# Altium PCB Controller.PcbDoc
Units mm, origin at the board's own origin, x right, y up, seen from the top; angles counter-clockwise.
Board outline 154.94 x 111.76 mm, 2 copper layers (Top Layer, Bottom Layer); 185 components, 89 nets, 468 pads, 0 vias.
Unrouted connection lines stored in the file: 6.
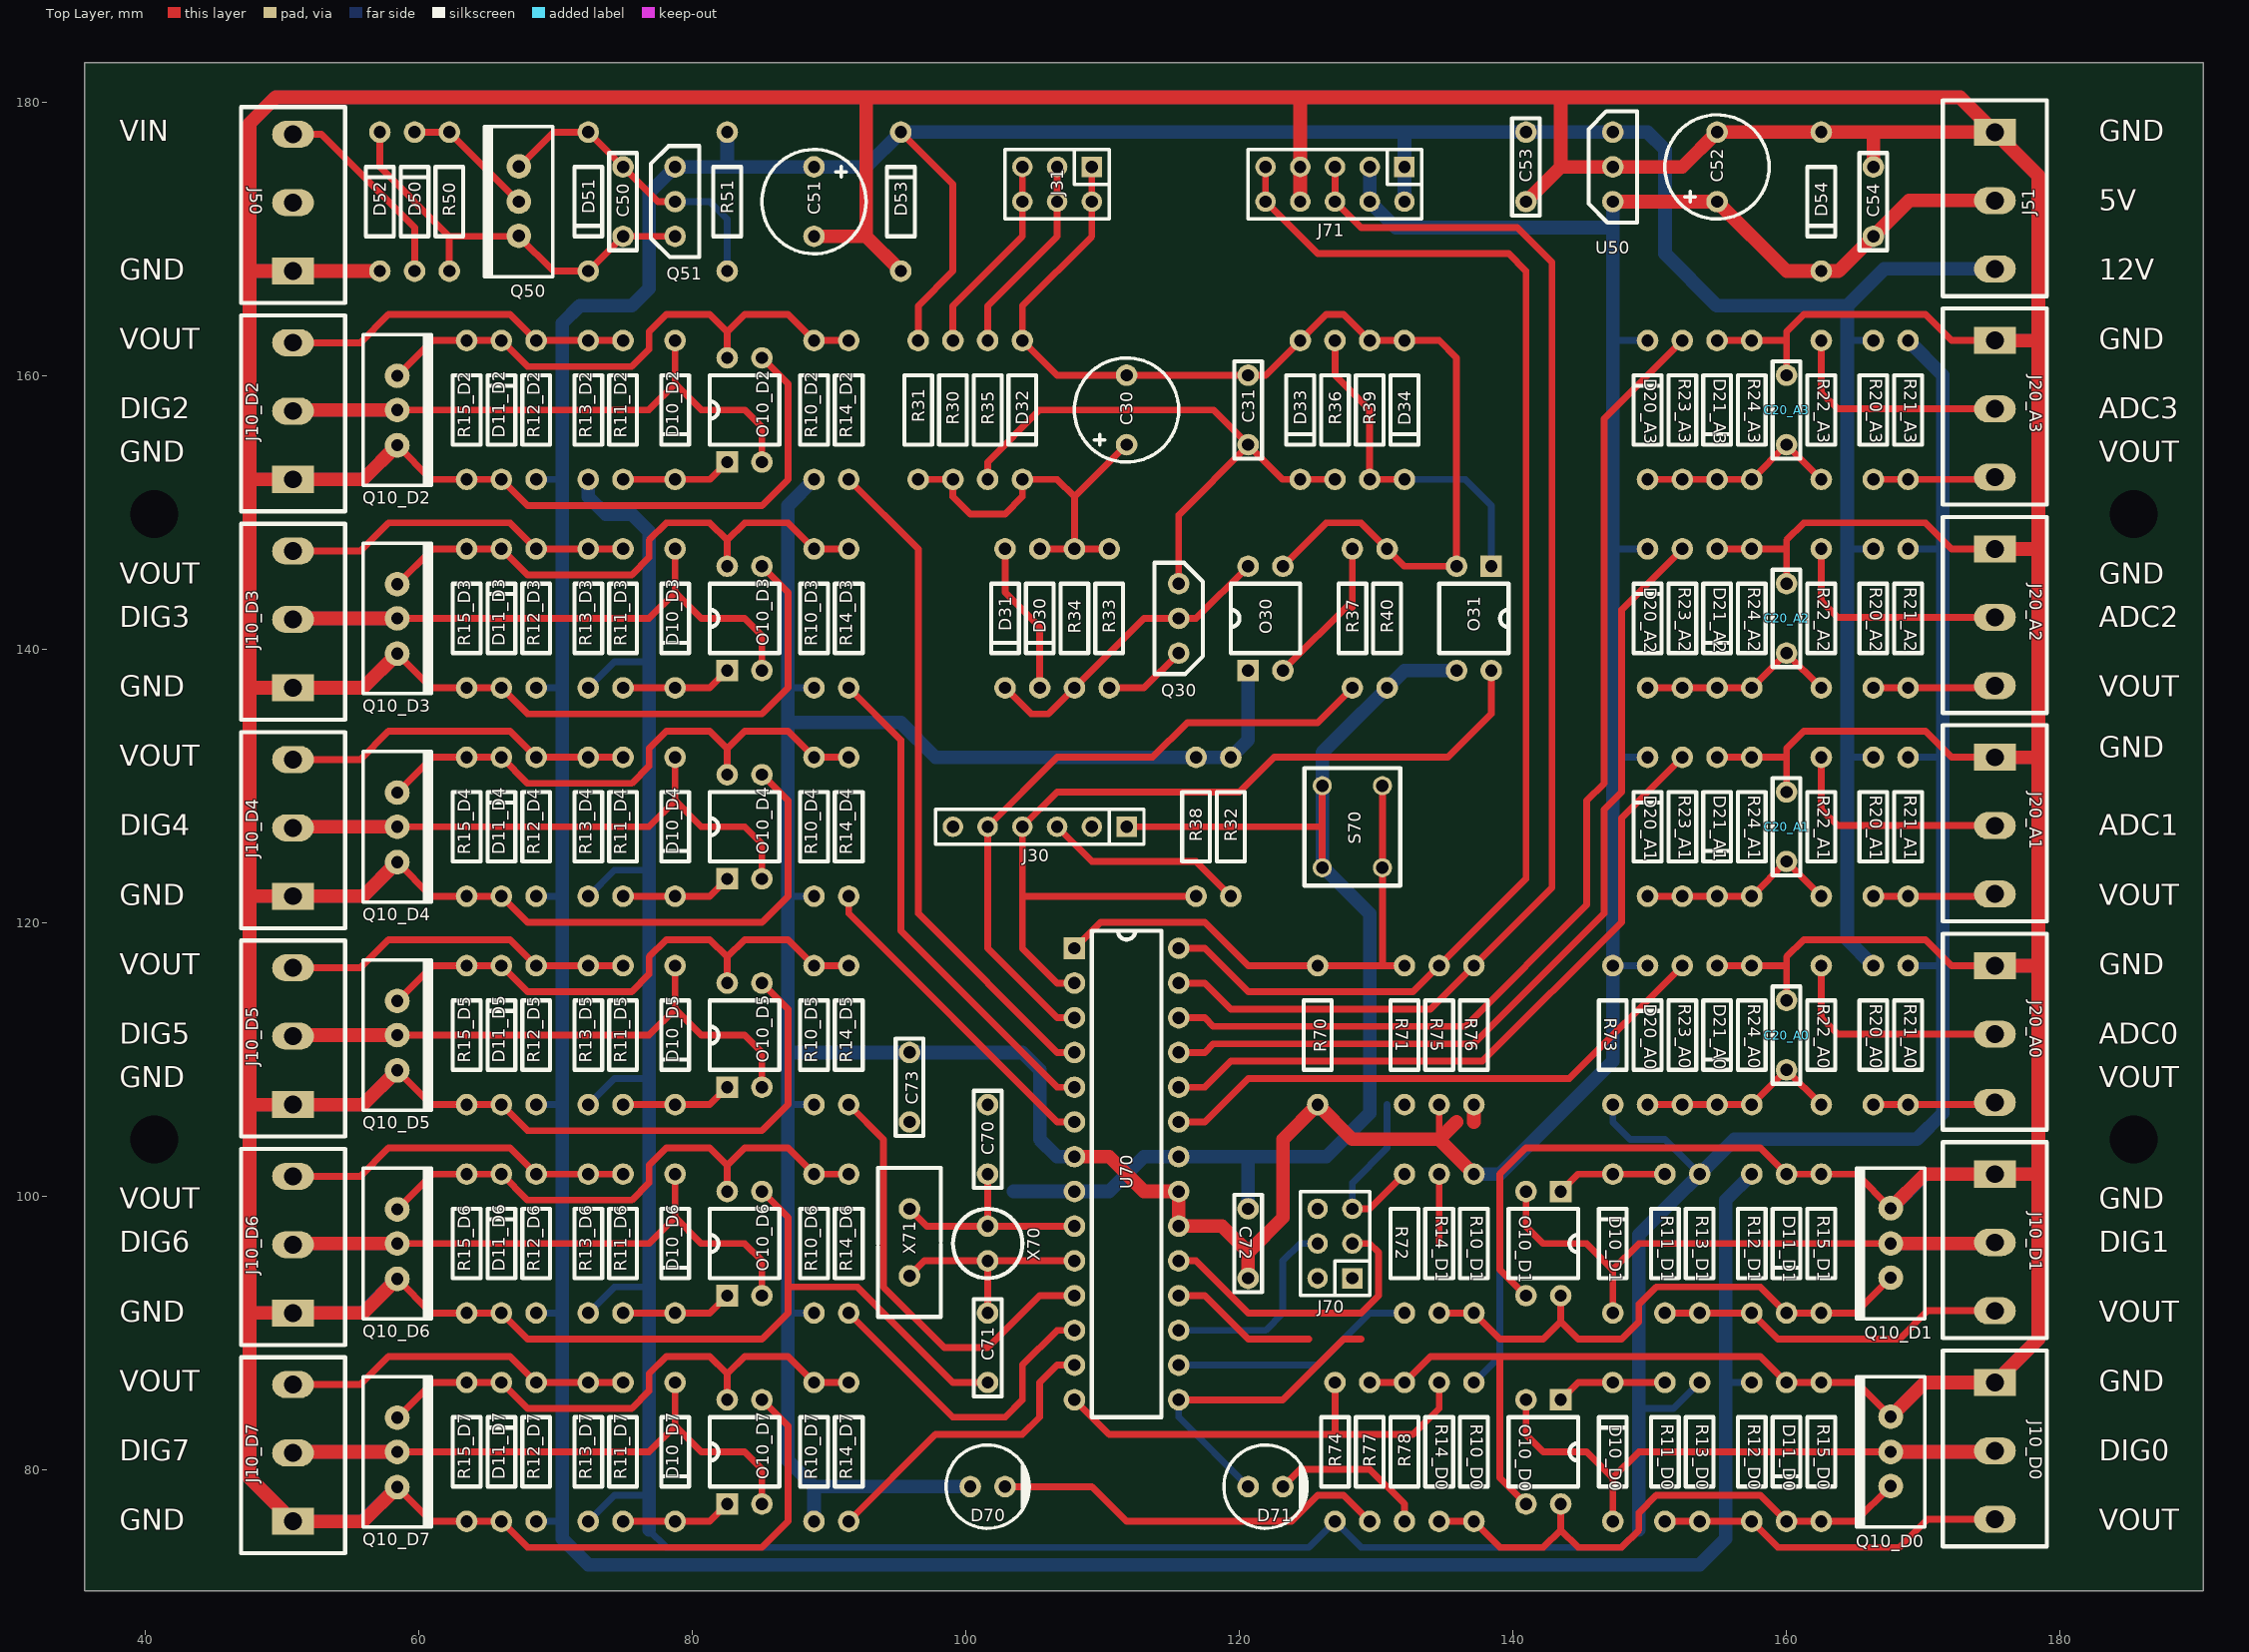
[diagram p0: Top Layer view]
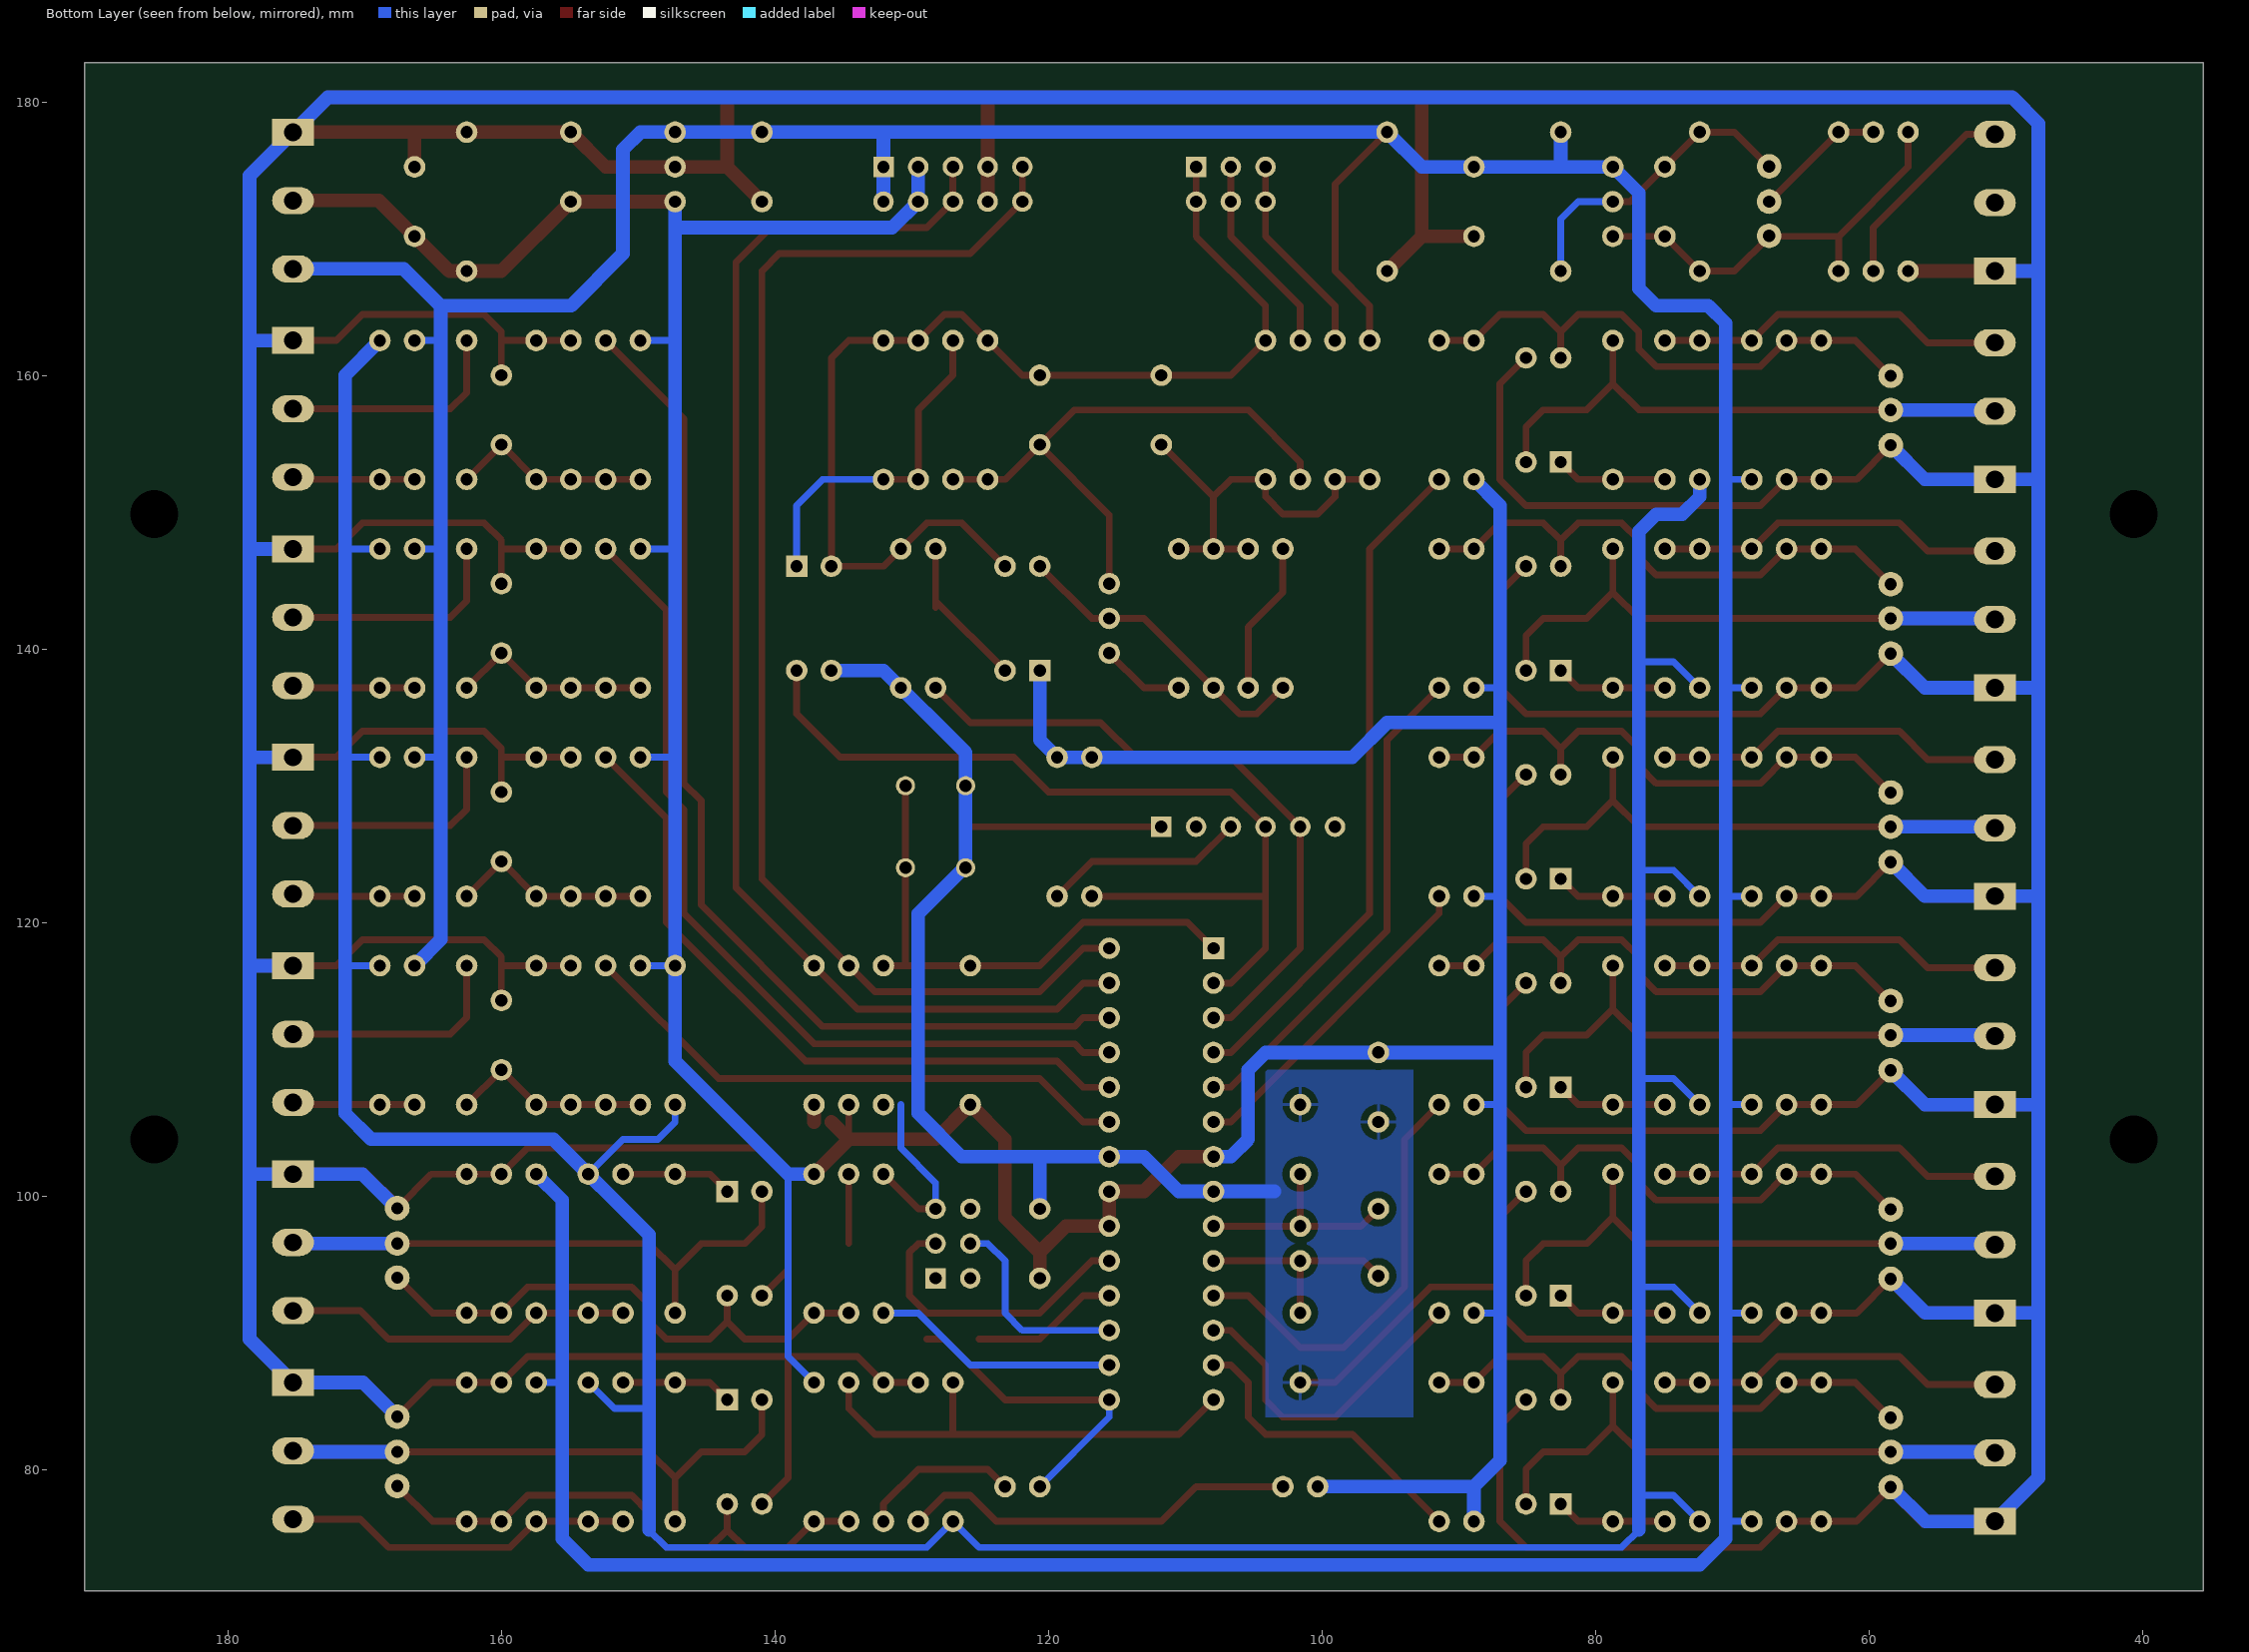
[diagram p1: Bottom Layer view, seen from below]

## Layer stack, top to bottom
Top Layer: signal copper 0.0356
Dielectric: dielectric 0.32, FR-4, Dk 4.8
Bottom Layer: signal copper 0.0356

## Board outline
35.56,71.12 190.5,71.12 190.5,182.88 35.56,182.88

## Design rules (kind name [scope] priority, off if disabled: settings)
Clearance [All] p1: gap=0.5
ComponentClearance [All] p1: gap=0.127 collisioncheckmode=3 verticalgap=0.254
HoleSize [All] p1: absolutevalues=TRUE maxlimit=5 minlimit=0.025 maxpercent=80.000 minpercent=20.000
PolygonConnect [All] p1: connectstyle=Relief reliefconductorwidth=0.254 reliefentries=4 polygonreliefangle="90 Angle"
RoomDefinition M0 [InComponentClass('M0')] p1: confinementstyle=ConfineIn formatcopy=TRUE lockcomponents=FALSE outline 92.71,73.66 149.86,73.66 149.86,182.88 92.71,182.88
RoomDefinition P0 [InComponentClass('P0')] p2: confinementstyle=ConfineIn formatcopy=TRUE lockcomponents=FALSE outline 45.72,165.1 180.34,165.1 180.34,180.34 45.72,180.34
RoomDefinition A0 [InComponentClass('A0')] p3: confinementstyle=ConfineIn formatcopy=TRUE lockcomponents=FALSE outline 180.34,119.38 147.32,119.38 147.32,104.14 180.34,104.14
RoomDefinition A1 [InComponentClass('A1')] p4: confinementstyle=ConfineIn formatcopy=TRUE lockcomponents=FALSE outline 180.34,134.62 147.32,134.62 147.32,119.38 180.34,119.38
RoomDefinition A2 [InComponentClass('A2')] p5: confinementstyle=ConfineIn formatcopy=TRUE lockcomponents=FALSE outline 180.34,149.86 147.32,149.86 147.32,134.62 180.34,134.62
RoomDefinition A3 [InComponentClass('A3')] p6: confinementstyle=ConfineIn formatcopy=TRUE lockcomponents=FALSE outline 180.34,165.1 147.32,165.1 147.32,149.86 180.34,149.86
RoomDefinition D0 [InComponentClass('D0')] p7: confinementstyle=ConfineIn formatcopy=TRUE lockcomponents=FALSE outline 180.34,88.9 132.08,88.9 132.08,73.66 180.34,73.66
RoomDefinition D1 [InComponentClass('D1')] p8: confinementstyle=ConfineIn formatcopy=TRUE lockcomponents=FALSE outline 180.34,104.14 132.08,104.14 132.08,88.9 180.34,88.9
RoomDefinition D2 [InComponentClass('D2')] p9: confinementstyle=ConfineIn formatcopy=TRUE lockcomponents=FALSE outline 45.72,149.86 93.98,149.86 93.98,165.1 45.72,165.1
RoomDefinition D3 [InComponentClass('D3')] p10: confinementstyle=ConfineIn formatcopy=TRUE lockcomponents=FALSE outline 45.72,134.62 93.98,134.62 93.98,149.86 45.72,149.86
RoomDefinition D4 [InComponentClass('D4')] p11: confinementstyle=ConfineIn formatcopy=TRUE lockcomponents=FALSE outline 45.72,119.38 93.98,119.38 93.98,134.62 45.72,134.62
RoomDefinition D5 [InComponentClass('D5')] p12: confinementstyle=ConfineIn formatcopy=TRUE lockcomponents=FALSE outline 45.72,104.14 92.71,104.14 92.71,119.38 45.72,119.38
RoomDefinition D6 [InComponentClass('D6')] p13: confinementstyle=ConfineIn formatcopy=TRUE lockcomponents=FALSE outline 45.72,88.9 92.71,88.9 92.71,104.14 45.72,104.14
RoomDefinition D7 [InComponentClass('D7')] p14: confinementstyle=ConfineIn formatcopy=TRUE lockcomponents=FALSE outline 45.72,73.66 92.71,73.66 92.71,88.9 45.72,88.9
RoomDefinition C0 [InComponentClass('C0')] p15: confinementstyle=ConfineIn formatcopy=TRUE lockcomponents=FALSE outline 146.05,114.3 146.05,177.8 82.55,177.8 82.55,114.3
RoutingVias [All] p1: holewidth=0.711 width=1.27 viastyle="Through Hole" minholewidth=0.711 minwidth=1.27 maxholewidth=0.711 maxwidth=1.27
SolderMaskExpansion [All] p1: expansion=0.102
TestPointUsage [All] p1: valid=0 allowmultiple=FALSE
Testpoint [All] p1: side=15 testpointundercomponent=TRUE minsize=1.016 maxsize=2.54 preferedsize=1.524 minholesize=0 maxholesize=1.016 preferedholesize=0.813 testpointgrid=0.025 style=1023 order=0-112345678
Width [All] p1: maxlimit=5 minlimit=0.5 preferedwidth=0.5
17 further rules are at their usual default settings.

## Classes and differential pairs
component class P0: C50 C51 C52 C53 C54 D50 D51 D52 D53 D54 J50 J51 Q50 Q51 R50 R51 U50
component class M0: C70 C71 C72 C73 D70 D71 J70 J71 R70 R71 R72 R73 R74 R75 R76 R77 R78 S70 U70 X70 X71
component class D7: D10_D7 D11_D7 J10_D7 O10_D7 Q10_D7 R10_D7 R11_D7 R12_D7 R13_D7 R14_D7 R15_D7
component class D6: D10_D6 D11_D6 J10_D6 O10_D6 Q10_D6 R10_D6 R11_D6 R12_D6 R13_D6 R14_D6 R15_D6
component class D5: D10_D5 D11_D5 J10_D5 O10_D5 Q10_D5 R10_D5 R11_D5 R12_D5 R13_D5 R14_D5 R15_D5
component class D4: D10_D4 D11_D4 J10_D4 O10_D4 Q10_D4 R10_D4 R11_D4 R12_D4 R13_D4 R14_D4 R15_D4
component class D3: D10_D3 D11_D3 J10_D3 O10_D3 Q10_D3 R10_D3 R11_D3 R12_D3 R13_D3 R14_D3 R15_D3
component class D2: D10_D2 D11_D2 J10_D2 O10_D2 Q10_D2 R10_D2 R11_D2 R12_D2 R13_D2 R14_D2 R15_D2
component class D1: D10_D1 D11_D1 J10_D1 O10_D1 Q10_D1 R10_D1 R11_D1 R12_D1 R13_D1 R14_D1 R15_D1
component class D0: D10_D0 D11_D0 J10_D0 O10_D0 Q10_D0 R10_D0 R11_D0 R12_D0 R13_D0 R14_D0 R15_D0
component class C0: C30 C31 D30 D31 D32 D33 D34 J30 J31 O30 O31 Q30 R30 R31 R32 R33 R34 R35 R36 R37 R38 R39 R40
component class A3: C20_A3 D20_A3 D21_A3 J20_A3 R20_A3 R21_A3 R22_A3 R23_A3 R24_A3
component class A2: C20_A2 D20_A2 D21_A2 J20_A2 R20_A2 R21_A2 R22_A2 R23_A2 R24_A2
component class A1: C20_A1 D20_A1 D21_A1 J20_A1 R20_A1 R21_A1 R22_A1 R23_A1 R24_A1
component class A0: C20_A0 D20_A0 D21_A0 J20_A0 R20_A0 R21_A0 R22_A0 R23_A0 R24_A0
channel class Analog: A0 A1 A2 A3
channel class Digital: D0 D1 D2 D3 D4 D5 D6 D7

## Components (designator, comment, footprint, x,y, rotation, side; value= is the part's Value field where it differs from the comment)
C20_A0 "100N" AXIAL02 160.02,109.22 r90 top (schematic designator C20)
C20_A1 "100N" AXIAL02 160.02,124.46 r90 top (schematic designator C20)
C20_A2 "100N" AXIAL02 160.02,139.7 r90 top (schematic designator C20)
C20_A3 "100N" AXIAL02 160.02,154.94 r90 top (schematic designator C20)
C30 "10U" RADIAL02P 111.76,154.94 r90 top
C31 "100P" AXIAL02 120.65,154.94 r90 top
C50 "100N" AXIAL02 74.93,170.18 r90 top
C51 "10U" RADIAL02P 88.9,175.26 r270 top
C52 "10U" RADIAL02P 154.94,172.72 r90 top
C53 "100N" AXIAL02 140.97,177.8 r270 top
C54 "100N" AXIAL02 166.37,170.18 r90 top
C70 "18P" AXIAL02 101.6,101.6 r90 top
C71 "18P" AXIAL02 101.6,91.44 r270 top
C72 "100N" AXIAL02 120.65,93.98 r90 top
C73 "100N" AXIAL02 95.885,110.49 r270 top
D10_D0 "D-1N4148" DO35S 147.32,76.2 r90 top (schematic designator D10)
D10_D1 "D-1N4148" DO35S 147.32,91.44 r90 top (schematic designator D10)
D10_D2 "D-1N4148" DO35S 78.74,162.56 r270 top (schematic designator D10)
D10_D3 "D-1N4148" DO35S 78.74,147.32 r270 top (schematic designator D10)
D10_D4 "D-1N4148" DO35S 78.74,132.08 r270 top (schematic designator D10)
D10_D5 "D-1N4148" DO35S 78.74,116.84 r270 top (schematic designator D10)
D10_D6 "D-1N4148" DO35S 78.74,101.6 r270 top (schematic designator D10)
D10_D7 "D-1N4148" DO35S 78.74,86.36 r270 top (schematic designator D10)
D11_D0 "5V6" DO35S 160.02,86.36 r270 top (schematic designator D11)
D11_D1 "5V6" DO35S 160.02,101.6 r270 top (schematic designator D11)
D11_D2 "5V6" DO35S 66.04,152.4 r90 top (schematic designator D11)
D11_D3 "5V6" DO35S 66.04,137.16 r90 top (schematic designator D11)
D11_D4 "5V6" DO35S 66.04,121.92 r90 top (schematic designator D11)
D11_D5 "5V6" DO35S 66.04,106.68 r90 top (schematic designator D11)
D11_D6 "5V6" DO35S 66.04,91.44 r90 top (schematic designator D11)
D11_D7 "5V6" DO35S 66.04,76.2 r90 top (schematic designator D11)
D20_A0 "D-1N4148" DO35S 149.86,106.68 r90 top (schematic designator D20)
D20_A1 "D-1N4148" DO35S 149.86,121.92 r90 top (schematic designator D20)
D20_A2 "D-1N4148" DO35S 149.86,137.16 r90 top (schematic designator D20)
D20_A3 "D-1N4148" DO35S 149.86,152.4 r90 top (schematic designator D20)
D21_A0 "D-1N4148" DO35S 154.94,116.84 r270 top (schematic designator D21)
D21_A1 "D-1N4148" DO35S 154.94,132.08 r270 top (schematic designator D21)
D21_A2 "D-1N4148" DO35S 154.94,147.32 r270 top (schematic designator D21)
D21_A3 "D-1N4148" DO35S 154.94,162.56 r270 top (schematic designator D21)
D30 "D-1N4148" DO35S 105.41,147.32 r270 top
D31 "D-1N4148" DO35S 102.87,147.32 r270 top
D32 "15V" DO35S 104.14,162.56 r270 top
D33 "5V6" DO35S 124.46,162.56 r270 top
D34 "D-1N4148" DO35S 132.08,162.56 r270 top
D50 "D-1N4001" DO35S 59.69,167.64 r90 top
D51 "12V" DO35S 72.39,177.8 r270 top
D52 "15V" DO35S 57.15,167.64 r90 top
D53 "15V" DO35S 95.25,167.64 r90 top
D54 "5V6" DO35S 162.56,177.8 r270 top
D70 "RED" LED5MM 101.6,78.74 r0 top
D71 "AMBER" LED5MM 121.92,78.74 r0 top
J10_D0 "TERM" MKD500S3 175.26,86.36 r270 top (schematic designator J10)
J10_D1 "TERM" MKD500S3 175.26,101.6 r270 top (schematic designator J10)
J10_D2 "TERM" MKD500S3 50.8,152.4 r90 top (schematic designator J10)
J10_D3 "TERM" MKD500S3 50.8,137.16 r90 top (schematic designator J10)
J10_D4 "TERM" MKD500S3 50.8,121.92 r90 top (schematic designator J10)
J10_D5 "TERM" MKD500S3 50.8,106.68 r90 top (schematic designator J10)
J10_D6 "TERM" MKD500S3 50.8,91.44 r90 top (schematic designator J10)
J10_D7 "TERM" MKD500S3 50.8,76.2 r90 top (schematic designator J10)
J20_A0 "TERM" MKD500S3 175.26,116.84 r270 top (schematic designator J20)
J20_A1 "TERM" MKD500S3 175.26,132.08 r270 top (schematic designator J20)
J20_A2 "TERM" MKD500S3 175.26,147.32 r270 top (schematic designator J20)
J20_A3 "TERM" MKD500S3 175.26,162.56 r270 top (schematic designator J20)
J30 "HDR1X6" HDR6X1 111.76,127 r180 top
J31 "HDR3X2" HDR3X2 109.22,175.26 r180 top
J50 "TERM" MKD500S3 50.8,167.64 r90 top
J51 "TERM" MKD500S3 175.26,177.8 r270 top
J70 "HDR3X2" HDR3X2 128.27,93.98 r90 top
J71 "HDR5X2" HDR5X2 132.08,175.26 r180 top
O10_D0 "FOD817B" DIP4 143.51,85.09 r270 top (schematic designator O10)
O10_D1 "FOD817B" DIP4 143.51,100.33 r270 top (schematic designator O10)
O10_D2 "FOD817B" DIP4 82.55,153.67 r90 top (schematic designator O10)
O10_D3 "FOD817B" DIP4 82.55,138.43 r90 top (schematic designator O10)
O10_D4 "FOD817B" DIP4 82.55,123.19 r90 top (schematic designator O10)
O10_D5 "FOD817B" DIP4 82.55,107.95 r90 top (schematic designator O10)
O10_D6 "FOD817B" DIP4 82.55,92.71 r90 top (schematic designator O10)
O10_D7 "FOD817B" DIP4 82.55,77.47 r90 top (schematic designator O10)
O30 "FOD817B" DIP4 120.65,138.43 r90 top
O31 "FOD817B" DIP4 138.43,146.05 r270 top
Q10_D0 "FQPF10N20C" TO220V 167.64,81.28 r90 top (schematic designator Q10)
Q10_D1 "FQPF10N20C" TO220V 167.64,96.52 r90 top (schematic designator Q10)
Q10_D2 "FQPF10N20C" TO220V 58.42,157.48 r270 top (schematic designator Q10)
Q10_D3 "FQPF10N20C" TO220V 58.42,142.24 r270 top (schematic designator Q10)
Q10_D4 "FQPF10N20C" TO220V 58.42,127 r270 top (schematic designator Q10)
Q10_D5 "FQPF10N20C" TO220V 58.42,111.76 r270 top (schematic designator Q10)
Q10_D6 "FQPF10N20C" TO220V 58.42,96.52 r270 top (schematic designator Q10)
Q10_D7 "FQPF10N20C" TO220V 58.42,81.28 r270 top (schematic designator Q10)
Q30 "Q-BC558" TO92 115.57,139.7 r90 top
Q50 "FQPF10N20C" TO220V 67.31,172.72 r90 top
Q51 "BC548" TO92 78.74,175.26 r270 top
R10_D0 "4K7" AXIAL04 137.16,76.2 r90 top (schematic designator R10)
R10_D1 "4K7" AXIAL04 137.16,91.44 r90 top (schematic designator R10)
R10_D2 "4K7" AXIAL04 88.9,162.56 r270 top (schematic designator R10)
R10_D3 "4K7" AXIAL04 88.9,147.32 r270 top (schematic designator R10)
R10_D4 "4K7" AXIAL04 88.9,132.08 r270 top (schematic designator R10)
R10_D5 "4K7" AXIAL04 88.9,116.84 r270 top (schematic designator R10)
R10_D6 "4K7" AXIAL04 88.9,101.6 r270 top (schematic designator R10)
R10_D7 "4K7" AXIAL04 88.9,86.36 r270 top (schematic designator R10)
R11_D0 "33R" AXIAL04 151.13,86.36 r270 top (schematic designator R11)
R11_D1 "33R" AXIAL04 151.13,101.6 r270 top (schematic designator R11)
R11_D2 "33R" AXIAL04 74.93,152.4 r90 top (schematic designator R11)
R11_D3 "33R" AXIAL04 74.93,137.16 r90 top (schematic designator R11)
R11_D4 "33R" AXIAL04 74.93,121.92 r90 top (schematic designator R11)
R11_D5 "33R" AXIAL04 74.93,106.68 r90 top (schematic designator R11)
R11_D6 "33R" AXIAL04 74.93,91.44 r90 top (schematic designator R11)
R11_D7 "33R" AXIAL04 74.93,76.2 r90 top (schematic designator R11)
R12_D0 "33R" AXIAL04 157.48,76.2 r90 top (schematic designator R12)
R12_D1 "33R" AXIAL04 157.48,91.44 r90 top (schematic designator R12)
R12_D2 "33R" AXIAL04 68.58,162.56 r270 top (schematic designator R12)
R12_D3 "33R" AXIAL04 68.58,147.32 r270 top (schematic designator R12)
R12_D4 "33R" AXIAL04 68.58,132.08 r270 top (schematic designator R12)
R12_D5 "33R" AXIAL04 68.58,116.84 r270 top (schematic designator R12)
R12_D6 "33R" AXIAL04 68.58,101.6 r270 top (schematic designator R12)
R12_D7 "33R" AXIAL04 68.58,86.36 r270 top (schematic designator R12)
R13_D0 "33R" AXIAL04 153.67,76.2 r90 top (schematic designator R13)
R13_D1 "33R" AXIAL04 153.67,91.44 r90 top (schematic designator R13)
R13_D2 "33R" AXIAL04 72.39,162.56 r270 top (schematic designator R13)
R13_D3 "33R" AXIAL04 72.39,147.32 r270 top (schematic designator R13)
R13_D4 "33R" AXIAL04 72.39,132.08 r270 top (schematic designator R13)
R13_D5 "33R" AXIAL04 72.39,116.84 r270 top (schematic designator R13)
R13_D6 "33R" AXIAL04 72.39,101.6 r270 top (schematic designator R13)
R13_D7 "33R" AXIAL04 72.39,86.36 r270 top (schematic designator R13)
R14_D0 "3K3" AXIAL04 134.62,76.2 r90 top (schematic designator R14)
R14_D1 "3K3" AXIAL04 134.62,91.44 r90 top (schematic designator R14)
R14_D2 "3K3" AXIAL04 91.44,162.56 r270 top (schematic designator R14)
R14_D3 "3K3" AXIAL04 91.44,147.32 r270 top (schematic designator R14)
R14_D4 "3K3" AXIAL04 91.44,132.08 r270 top (schematic designator R14)
R14_D5 "3K3" AXIAL04 91.44,116.84 r270 top (schematic designator R14)
R14_D6 "3K3" AXIAL04 91.44,101.6 r270 top (schematic designator R14)
R14_D7 "3K3" AXIAL04 91.44,86.36 r270 top (schematic designator R14)
R15_D0 "100K" AXIAL04 162.56,86.36 r270 top (schematic designator R15)
R15_D1 "100K" AXIAL04 162.56,101.6 r270 top (schematic designator R15)
R15_D2 "100K" AXIAL04 63.5,152.4 r90 top (schematic designator R15)
R15_D3 "100K" AXIAL04 63.5,137.16 r90 top (schematic designator R15)
R15_D4 "100K" AXIAL04 63.5,121.92 r90 top (schematic designator R15)
R15_D5 "100K" AXIAL04 63.5,106.68 r90 top (schematic designator R15)
R15_D6 "100K" AXIAL04 63.5,91.44 r90 top (schematic designator R15)
R15_D7 "100K" AXIAL04 63.5,76.2 r90 top (schematic designator R15)
R20_A0 "33R" AXIAL04 166.37,106.68 r90 top (schematic designator R20)
R20_A1 "33R" AXIAL04 166.37,121.92 r90 top (schematic designator R20)
R20_A2 "33R" AXIAL04 166.37,137.16 r90 top (schematic designator R20)
R20_A3 "33R" AXIAL04 166.37,152.4 r90 top (schematic designator R20)
R21_A0 "33R" AXIAL04 168.91,106.68 r90 top (schematic designator R21)
R21_A1 "33R" AXIAL04 168.91,121.92 r90 top (schematic designator R21)
R21_A2 "33R" AXIAL04 168.91,137.16 r90 top (schematic designator R21)
R21_A3 "33R" AXIAL04 168.91,152.4 r90 top (schematic designator R21)
R22_A0 "33R" AXIAL04 162.56,106.68 r90 top (schematic designator R22)
R22_A1 "33R" AXIAL04 162.56,121.92 r90 top (schematic designator R22)
R22_A2 "33R" AXIAL04 162.56,137.16 r90 top (schematic designator R22)
R22_A3 "33R" AXIAL04 162.56,152.4 r90 top (schematic designator R22)
R23_A0 "1K" AXIAL04 152.4,106.68 r90 top (schematic designator R23)
R23_A1 "1K" AXIAL04 152.4,121.92 r90 top (schematic designator R23)
R23_A2 "1K" AXIAL04 152.4,137.16 r90 top (schematic designator R23)
R23_A3 "1K" AXIAL04 152.4,152.4 r90 top (schematic designator R23)
R24_A0 "33R" AXIAL04 157.48,116.84 r270 top (schematic designator R24)
R24_A1 "33R" AXIAL04 157.48,132.08 r270 top (schematic designator R24)
R24_A2 "33R" AXIAL04 157.48,147.32 r270 top (schematic designator R24)
R24_A3 "33R" AXIAL04 157.48,162.56 r270 top (schematic designator R24)
R30 "33R" AXIAL04 99.06,162.56 r270 top
R31 "33R" AXIAL04 96.52,152.4 r90 top
R32 "33R" AXIAL04 119.38,121.92 r90 top
R33 "33R" AXIAL04 110.49,137.16 r90 top
R34 "1K5" AXIAL04 107.95,137.16 r90 top
R35 "33R" AXIAL04 101.6,162.56 r270 top
R36 "3K3" AXIAL04 127,162.56 r270 top
R37 "3K3" AXIAL04 128.27,137.16 r90 top
R38 "4K7" AXIAL04 116.84,121.92 r90 top
R39 "1K5" AXIAL04 129.54,162.56 r270 top
R40 "33R" AXIAL04 130.81,147.32 r270 top
R50 "100K" AXIAL04 62.23,167.64 r90 top
R51 "10R" AXIAL04 82.55,177.8 r270 top
R70 "10K" AXIAL04 125.73,116.84 r270 top
R71 "33R" AXIAL04 132.08,116.84 r270 top
R72 "33R" AXIAL04 132.08,91.44 r90 top
R73 "33R" AXIAL04 147.32,106.68 r90 top
R74 "33R" AXIAL04 127,76.2 r90 top
R75 "1K" AXIAL04 134.62,116.84 r270 top
R76 "1K" AXIAL04 137.16,116.84 r270 top
R77 "1K" AXIAL04 129.54,86.36 r270 top
R78 "1K" AXIAL04 132.08,86.36 r270 top
S70 "S-BUTTON" SWPB 128.27,127 r0 top
U50 "LP2950-5V" TO92 147.32,177.8 r270 top
U70 "ATMEGA8" DIP28N 107.95,118.11 r0 top
X70 "32.768K" RADIAL01 101.6,97.79 r270 top
X71 "4M" HC49 95.885,99.06 r270 top

## Footprints (in the part's own frame and the unit in brackets; to place one, negate y for a bottom-side part, rotate by r counter-clockwise, add the part's x,y. Pads: shape width x height; smd on the part's side, far side on the other; paste and mask are expansions set on the pad)
AXIAL02 [mil]
  round 62 hole 35.43: 1(0,0) 2(200,0)
  silkscreen extent -40,-40 240,40
AXIAL04 [mil]
  round 62 hole 35.43: 1(0,0) 2(400,0)
  silkscreen extent 100,-40 300,40
DIP4 [mil]
  rect 62x62 hole 35.43: 1(0,0)
  round 62 hole 35.43: 2(0,-100) 3(300,-100) 4(300,0)
  silkscreen extent 50,-150 250,50
DIP28N [mil]
  rect 62x62 hole 35.43: 1(0,0)
  round 62 hole 35.43: 2(0,-100) 3(0,-200) 4(0,-300) 5(0,-400) 6(0,-500) 7(0,-600) 8(0,-700) 9(0,-800) 10(0,-900) 11(0,-1000) 12(0,-1100) 13(0,-1200) 14(0,-1300) 15(300,-1300) 16(300,-1200) 17(300,-1100) 18(300,-1000) 19(300,-900) 20(300,-800) 21(300,-700) 22(300,-600) 23(300,-500) 24(300,-400) 25(300,-300) 26(300,-200) 27(300,-100) 28(300,0)
  silkscreen extent 50,-1350 250,50
DO35S [mil]
  round 62 hole 35.43: 1(0,0) 2(400,0)
  silkscreen extent 100,-40 300,40
HC49 [mil]
  round 62 hole 35.43: 1(0,0) 2(192.91,0)
  silkscreen extent -118,-91 311,91
HDR3X2 [mm] "Header 3 x 2"
  rect 1.5x1.5 hole 0.9: 1(0,0)
  round 1.5 hole 0.9: 2(0,2.54) 3(2.54,0) 4(2.54,2.54) 5(5.08,0) 6(5.08,2.54)
  silkscreen extent -1.27,-1.27 6.35,3.81
HDR5X2 [mm] "Header 5 x 2"
  rect 1.5x1.5 hole 0.9: 1(0,0)
  round 1.5 hole 0.9: 2(0,2.54) 3(2.54,0) 4(2.54,2.54) 5(5.08,0) 6(5.08,2.54) 7(7.62,0) 8(7.62,2.54) 9(10.16,0) 10(10.16,2.54)
  silkscreen extent -1.27,-1.27 11.43,3.81
HDR6X1 [mm] "Header 6 x 1"
  rect 1.5x1.5 hole 0.9: 1(0,0)
  round 1.5 hole 0.9: 2(2.54,0) 3(5.08,0) 4(7.62,0) 5(10.16,0) 6(12.7,0)
  silkscreen extent -1.27,-1.27 13.97,1.27
LED5MM [mil]
  round 62 hole 35.43: 1(-50,0) 2(50,0)
  silkscreen extent -120,-120 120,120
MKD500S3 [mil]
  rect 78x120 hole 51.18: 1(0,0)
  oval 78x120 hole 51.18: 2(196.85,0) 3(393.7,0)
  silkscreen extent -92,-150 472,150
RADIAL01 [mil]
  round 62 hole 35.43: 1(0,0) 2(100,0)
  silkscreen extent -50,-100 150,100
RADIAL02P [mil]
  round 62 hole 35.43: 1(0,0) 2(200,0)
  silkscreen extent -50,-150 250,150
SWPB [mm]
  round 1.4 hole 0.9: 1(-2.2,3) 2(2.2,3) 3(-2.2,-3) 4(2.2,-3)
  silkscreen extent -3.5,-4.3 3.5,4.3
TO92 [mil]
  round 62 hole 35.43: 1(0,0) 2(100,0) 3(200,0)
  silkscreen extent -60,-70 260,70
TO220V [mm] "TO220"
  round 1.8 hole 0.9: 1(-2.5,0) 2(0,0) 3(2.58,0)
  silkscreen extent -5.5,-2.5 5.5,2.5

## Part data
C20_A0 C20_A1 C20_A2 C20_A3 C50 C53 C54 C72 C73: library part C-B100N, "CAPACITOR"
C30 C51 C52: library part C-A10U, "CAP"
C31: library part C-B100P, "CAPACITOR"
C70 C71: library part C-B18P, "CAPACITOR"
D10_D0 D10_D1 D10_D2 D10_D3 D10_D4 D10_D5 D10_D6 D10_D7 D20_A0 D20_A1 D20_A2 D20_A3 D21_A0 D21_A1 D21_A2 D21_A3 D30 D31 D34: "1N4148"
D11_D0 D11_D1 D11_D2 D11_D3 D11_D4 D11_D5 D11_D6 D11_D7 D51: library part D-BZX79-12, "ZENER DIODE"
D32 D52 D53: library part D-BZX79-15, "ZENER DIODE"
D33 D54: library part D-BZX79-5V6, "ZENER DIODE"
D50: "1N4001"
D70: library part O-RED, "LED"
D71: library part O-AMBER, "LED"
J10_D0 J10_D1 J10_D2 J10_D3 J10_D4 J10_D5 J10_D6 J10_D7 J20_A0 J20_A1 J20_A2 J20_A3 J50 J51: library part J-SCR-3, "CONNECTOR"
J30: library part J-HDR1X6, "CONNECTOR"
J31: library part J-HDR3X2A, "CONNECTOR"
J70: library part J-HDR3X2, "CONNECTOR"
J71: library part J-HDR5X2A, "CONNECTOR"
O10_D0 O10_D1 O10_D2 O10_D3 O10_D4 O10_D5 O10_D6 O10_D7 O30 O31: library part O-FOD817B, "OPTO ISOLATOR"
Q10_D0 Q10_D1 Q10_D2 Q10_D3 Q10_D4 Q10_D5 Q10_D6 Q10_D7 Q50: library part Q-FQPF10N20C, "MOSFET"
Q30: "BC558"
Q51: library part Q-BC548
R10_D0 R10_D1 R10_D2 R10_D3 R10_D4 R10_D5 R10_D6 R10_D7 R38: library part R-A4K7, "RESISTOR"
R11_D0 R11_D1 R11_D2 R11_D3 R11_D4 R11_D5 R11_D6 R11_D7 R12_D0 R12_D1 R12_D2 R12_D3 R12_D4 R12_D5 R12_D6 R12_D7 R13_D0 R13_D1 R13_D2 R13_D3 R13_D4 R13_D5 R13_D6 R13_D7 R20_A0 R20_A1 R20_A2 R20_A3 R21_A0 R21_A1 R21_A2 R21_A3 R22_A0 R22_A1 R22_A2 R22_A3 R24_A0 R24_A1 R24_A2 R24_A3 R30 R31 R32 R33 R35 R40 R71 R72 R73 R74: library part R-A33R, "RESISTOR"
R14_D0 R14_D1 R14_D2 R14_D3 R14_D4 R14_D5 R14_D6 R14_D7 R36 R37: library part R-A3K3, "RESISTOR"
R15_D0 R15_D1 R15_D2 R15_D3 R15_D4 R15_D5 R15_D6 R15_D7 R50: library part R-A100K, "RESISTOR"
R23_A0 R23_A1 R23_A2 R23_A3 R75 R76 R77 R78: library part R-A1K, "RESISTOR"
R34 R39: library part R-A1K5, "RESISTOR"
R51: library part R-A10R, "RESISTOR"
R70: library part R-A10K, "RESISTOR"
S70: "PUSH BUTTON SWITCH"
U50: library part U-LP2950, "LP2950"
U70: library part U-ATMEGA8, "MICROCONTROLLER"
X70: library part X-32K768, "CRYSTAL"
X71: library part X-4M, "CRYSTAL"

## Free pads (board coordinates)
  round 0 hole 3.5 unplated: 0(40.64,104.14) 0(40.64,149.86) 0(185.42,104.14) 0(185.42,149.86)

## Nets (pads, with @x,y where several pads share a name; then routed paths per layer and width w, separated by ;. In a path a pad name is that pad's centre, name@x,y a point inside that pad or via, vN(x,y) a via of type N, cw(c..) or ccw(c..) an arc to the next point about the centre after c; other vN are vias at no path point)
0V: C20_A0.2 C20_A1.2 C20_A2.2 C20_A3.2 C51.2 C52.2 C53.2 C54.2 C70.2 C71.2 C72.2 C73.2 D11_D0.1 D11_D1.1 D11_D2.1 D11_D3.1 D11_D4.1 D11_D5.1 D11_D6.1 D11_D7.1 D21_A0.1 D21_A1.1 D21_A2.1 D21_A3.1 D52.1 D53.1 D54.1 J10_D0.1 J10_D1.1 J10_D2.1 J10_D3.1 J10_D4.1 J10_D5.1 J10_D6.1 J10_D7.1 J20_A0.1 J20_A1.1 J20_A2.1 J20_A3.1 J30.1 J50.1 J51.1 J70.6 J71.7 J71.8 O10_D0.3 O10_D1.3 O10_D2.3 O10_D3.3 O10_D4.3 O10_D5.3 O10_D6.3 O10_D7.3 O31.3 Q10_D0.3 Q10_D1.3 Q10_D2.3 Q10_D3.3 Q10_D4.3 Q10_D5.3 Q10_D6.3 Q10_D7.3 R15_D0.1 R15_D1.1 R15_D2.1 R15_D3.1 R15_D4.1 R15_D5.1 R15_D6.1 R15_D7.1 R24_A0.1 R24_A1.1 R24_A2.1 R24_A3.1 R40.2 R77.1 R78.1 S70.1 S70.3 U50.2 U70.8 U70.22 | length 1485.9
  Top Layer w0.5: Q10_D7.3 60.92,76.2 D11_D7.1 67.945,74.295 85.09,74.295 86.995,76.2 86.995,83.185 O10_D7.3 ; Q10_D6.3 60.92,91.44 D11_D6.1 67.945,89.535 85.09,89.535 86.995,91.44 86.995,98.425 O10_D6.3 ; Q10_D5.3 60.92,106.68 D11_D5.1 67.945,104.775 85.09,104.775 86.995,106.68 86.995,113.665 O10_D5.3 ; Q10_D4.3 60.92,121.92 D11_D4.1 67.945,120.015 85.09,120.015 86.995,121.92 86.995,128.905 O10_D4.3 ; Q10_D3.3 60.92,137.16 D11_D3.1 67.945,135.255 85.09,135.255 86.995,137.16 86.995,144.145 O10_D3.3 ; Q10_D2.3 60.92,152.4 D11_D2.1 67.945,150.495 85.09,150.495 86.995,152.4 86.995,159.385 O10_D2.3 ; 86.995,93.345 92.075,93.345 99.06,86.36 C71.2 ; J30.1 126.07,127 ; S70.3 S70.1 ; R77.1 R78.1 133.985,88.265 158.115,88.265 D11_D0.1 165.14,86.36 Q10_D0.3 ; 139.065,88.265 139.065,79.375 O10_D0.3 ; O10_D1.3 139.065,94.615 139.065,101.6 140.97,103.505 158.115,103.505 D11_D1.1 165.14,101.6 Q10_D1.3 ; D21_A0.1 160.02,116.84 ; D21_A1.1 160.02,132.08 ; D21_A2.1 160.02,147.32 ; D21_A3.1 160.02,162.56 ; C20_A0.2 160.02,117.475 161.29,118.745 170.18,118.745 172.085,116.84 J20_A0.1 ; C20_A1.2 160.02,132.715 161.29,133.985 170.18,133.985 172.085,132.08 J20_A1.1 ; C20_A2.2 160.02,147.955 161.29,149.225 170.18,149.225 172.085,147.32 J20_A2.1 ; C20_A3.2 160.02,163.195 161.29,164.465 170.18,164.465 172.085,162.56 J20_A3.1
  Top Layer w1: 47.625,91.44 55.92,91.44 Q10_D6.3 ; 47.625,106.68 55.92,106.68 Q10_D5.3 ; 47.625,121.92 55.92,121.92 Q10_D4.3 ; 47.625,137.16 55.92,137.16 Q10_D3.3 ; 47.625,152.4 55.92,152.4 Q10_D2.3 ; 47.625,167.64 D52.1 ; Q10_D7.3 55.92,76.2 J10_D7.1 47.625,79.375 47.625,178.435 49.53,180.34 172.72,180.34 178.435,174.625 178.435,89.535 J10_D0.1 170.14,86.36 Q10_D0.3 ; C51.2 92.71,170.18 ; 92.71,180.34 92.71,170.18 ; D53.1 92.71,170.18 ; J71.8 124.46,180.34 ; C53.2 143.51,175.26 ; 143.51,180.34 143.51,175.26 ; C54.2 166.37,177.8 ; Q10_D1.3 170.14,101.6 178.435,101.6 ; J20_A0.1 178.435,116.84 ; J20_A1.1 178.435,132.08 ; J20_A2.1 178.435,147.32 ; J20_A3.1 178.435,162.56 ; J51.1 C52.2 152.4,175.26 143.51,175.26
  Bottom Layer w1: 47.625,91.44 55.88,91.44 Q10_D6.3@58.42,93.98 ; 47.625,106.68 55.92,106.68 Q10_D5.3 ; 47.625,121.92 55.92,121.92 Q10_D4.3 ; 47.625,137.16 55.92,137.16 Q10_D3.3 ; 47.625,152.4 55.92,152.4 Q10_D2.3 ; 47.625,167.64 J50.1 ; Q10_D7.3 58.38,78.7 55.88,76.2 J10_D7.1 47.625,79.375 47.625,178.435 49.53,180.34 172.72,180.34 178.435,174.625 178.435,89.535 J10_D0.1 170.14,86.36 Q10_D0.3 ; 103.505,100.33 110.49,100.33 113.03,102.87 126.365,102.87 129.54,106.045 129.54,120.65 126.07,124.12 126.07,132.42 132.08,138.43 O31.3 ; C72.2 120.65,102.87 ; Q10_D1.3@167.64,99.06 170.18,101.6 178.435,101.6 ; J20_A0.1 178.435,116.84 ; J20_A1.1 178.435,132.08 ; J20_A2.1 178.435,147.32 ; J20_A3.1 178.435,162.56
5V: C52.1 C54.1 C72.1 C73.1 D20_A0.2 D20_A1.2 D20_A2.2 D20_A3.2 D54.2 D70.1 J51.2 J70.2 J71.3 J71.4 O30.1 R10_D0.2 R10_D1.2 R10_D2.2 R10_D3.2 R10_D4.2 R10_D5.2 R10_D6.2 R10_D7.2 R32.2 R38.2 R70.2 R73.2 R75.2 R76.2 U50.3 U70.7 U70.20 U70.21 | length 371.2
  Top Layer w0.5: 134.62,104.14 R75.2
  Top Layer w1: U70.7 110.49,102.87 113.03,100.33 U70.21 U70.20 118.745,97.79 120.65,95.885 ; C72.1 120.65,95.885 ; 135.89,105.41 134.62,104.14 ; R10_D1.2 134.62,104.14 ; 137.16,105.41 R76.2 ; U50.3 C52.1 160.02,167.64 163.83,167.64 168.99,172.8 J51.2 ; 120.65,95.885 123.19,98.425 123.19,104.14 R70.2 128.27,104.14 134.62,104.14
  Bottom Layer w0.5: 86.995,91.44 R10_D6.2 ; 86.995,106.68 R10_D5.2 ; 86.995,121.92 R10_D4.2 ; 86.995,137.16 R10_D3.2 ; R10_D0.2 139.065,88.265 139.065,101.6 ; R73.2 D20_A0.2 ; 147.32,132.08 D20_A1.2 ; 147.32,147.32 D20_A2.2 ; 147.32,162.56 D20_A3.2
  Bottom Layer w1: 86.995,110.49 104.14,110.49 105.41,109.22 105.41,104.14 106.68,102.87 U70.7 ; 86.995,134.62 95.25,134.62 97.79,132.08 R32.2 120.65,133.35 O30.1 ; R10_D7.2 88.9,78.74 ; R10_D2.2 86.995,150.495 86.995,80.645 88.9,78.74 ; D70.1 88.9,78.74 ; J71.3 J71.4 131.445,170.815 147.32,170.815 ; R10_D1.2 139.065,101.6 147.32,109.855 U50.3
5VAUX: R13_D0.2 R13_D1.2 R13_D2.2 R13_D3.2 R13_D4.2 R13_D5.2 R13_D6.2 R13_D7.2 R21_A0.2 R21_A1.2 R21_A2.2 R21_A3.2 R73.1 R74.1 | length 308.1
  Bottom Layer w0.5: R13_D7.2 74.295,78.105 76.835,78.105 ; R13_D6.2 74.295,93.345 76.835,93.345 ; R13_D5.2 74.295,108.585 76.835,108.585 ; R13_D4.2 74.295,123.825 76.835,123.825 ; R13_D3.2 74.295,139.065 76.835,139.065 ; 76.835,75.565 78.105,74.295 125.095,74.295 R74.1 128.905,74.295 147.955,74.295 149.225,75.565 ; R73.1 147.32,105.41 148.59,104.14 151.13,104.14 R13_D1.2 ; 149.225,84.455 151.765,84.455 R13_D0.2 ; R21_A0.2 171.45,116.84 ; R21_A1.2 171.45,132.08 ; R21_A2.2 171.45,147.32
  Bottom Layer w1: R13_D2.2 72.39,151.13 73.66,149.86 75.565,149.86 76.835,148.59 76.835,75.565 ; 149.225,75.565 149.225,97.155 156.21,104.14 169.545,104.14 171.45,106.045 171.45,160.02 R21_A3.2
12V: C51.1 C53.1 D53.2 J51.3 J71.1 J71.2 Q51.1 R12_D0.2 R12_D1.2 R12_D2.2 R12_D3.2 R12_D4.2 R12_D5.2 R12_D6.2 R12_D7.2 R20_A0.2 R20_A1.2 R20_A2.2 R20_A3.2 R31.2 R51.1 U50.1 | length 422.1
  Top Layer w0.5: D53.2 99.06,173.99 99.06,167.64 96.52,165.1 R31.2
  Bottom Layer w0.5: R12_D7.2 70.485,76.2 ; R12_D6.2 70.485,91.44 ; R12_D5.2 70.485,106.68 ; R12_D4.2 70.485,121.92 ; R12_D3.2 70.485,137.16 ; R12_D2.2 70.485,152.4 ; 155.575,86.36 R12_D0.2 ; 164.465,132.08 R20_A1.2 ; 164.465,147.32 R20_A2.2 ; 164.465,162.56 R20_A3.2
  Bottom Layer w1: 82.55,175.26 R51.1 ; J71.2 132.08,177.8 ; R12_D1.2 155.575,99.695 155.575,74.93 153.67,73.025 72.39,73.025 70.485,74.93 70.485,163.83 71.755,165.1 75.565,165.1 76.835,166.37 76.835,173.355 Q51.1 92.71,175.26 D53.2 149.86,177.8 151.13,176.53 151.13,168.91 154.94,165.1 164.465,165.1 ; R20_A0.2 164.465,118.745 164.465,165.1 ; J51.3 167.165,167.8 164.465,165.1
AIN0: R23_A0.2 U70.23 | length 41.6
  Top Layer w0.5: U70.23 117.475,105.41 120.65,108.585 144.145,108.585 R23_A0.2
AIN1: R23_A1.2 U70.24 | length 51.3
  Top Layer w0.5: U70.24 117.475,107.95 119.38,109.855 137.795,109.855 147.955,120.015 147.955,127.635 R23_A1.2
AIN2: R23_A2.2 U70.25 | length 64.4
  Top Layer w0.5: U70.25 117.475,110.49 118.11,111.125 137.16,111.125 146.685,120.65 146.685,128.27 147.955,129.54 147.955,142.875 R23_A2.2
AIN3: R23_A3.2 U70.26 | length 78
  Top Layer w0.5: U70.26 117.475,113.03 118.11,112.395 136.525,112.395 145.415,121.285 145.415,128.905 146.685,130.175 146.685,156.845 R23_A3.2
BUS-12V: J31.5 J31.6 R30.1 | length 14.8
  Top Layer w0.5: R30.1 99.06,165.1 104.14,170.18 J31.5
BUS-DATA: J31.3 J31.4 R35.1 | length 14.8
  Top Layer w0.5: R35.1 101.6,165.1 106.68,170.18 J31.3
BUS-GND: C30.2 C31.2 D32.1 D33.1 D34.1 J31.1 J31.2 O30.3 O31.2 R39.1 R40.1 | length 81.3
  Top Layer w0.5: J31.1 109.22,170.18 104.14,165.1 D32.1 106.68,160.02 121.92,160.02 126.365,164.465 127.635,164.465 R39.1 134.62,162.56 135.89,161.29 O31.2 132.08,146.05 128.905,149.225 126.365,149.225 O30.3
BUS-RX: J30.4 O31.4 R38.1 U70.2 | length 67.3
  Top Layer w0.5: 104.14,121.92 R38.1 ; U70.2 106.68,115.57 104.14,118.11 J30.4 106.68,129.54 120.015,129.54 122.555,132.08 135.255,132.08 138.43,135.255 O31.4
BUS-TX: J30.5 R37.1 U70.3 | length 48.2
  Top Layer w0.5: U70.3 106.68,113.03 101.6,118.11 J30.5 106.68,132.08 113.665,132.08 116.205,134.62 125.73,134.62 R37.1
DIO0: R14_D0.2 R74.2 U70.14 | length 34.2
  Top Layer w0.5: U70.14 110.49,82.55 132.715,82.55 134.62,84.455 R14_D0.2 ; 127,82.55 R74.2
DIO1: D71.1 R14_D1.2 U70.15 | length 28.7
  Top Layer w0.5: U70.15 123.19,85.09 127.635,89.535 128.905,89.535 ; 134.62,96.52 R14_D1.2
  Bottom Layer w0.5: U70.15 115.57,83.82 D71.1
DIO2: R14_D2.2 U70.4 | length 49.5
  Top Layer w0.5: R14_D2.2 96.52,147.32 96.52,120.65 106.68,110.49 U70.4
DIO3: R14_D3.2 U70.5 | length 36.8
  Top Layer w0.5: R14_D3.2 95.25,133.35 95.25,119.38 106.68,107.95 U70.5
DIO4: R14_D4.2 U70.6 | length 24.1
  Top Layer w0.5: R14_D4.2 91.44,120.65 106.68,105.41 U70.6
DIO5: R14_D5.2 U70.11 | length 31.8
  Top Layer w0.5: R14_D5.2 93.98,104.14 93.98,93.345 98.425,88.9 101.6,88.9 105.41,92.71 U70.11
DIO6: R14_D6.2 U70.12 | length 23.8
  Top Layer w0.5: R14_D6.2 99.06,83.82 102.87,83.82 104.14,85.09 104.14,87.63 106.68,90.17 U70.12
DIO7: R14_D7.2 U70.13 | length 22.7
  Top Layer w0.5: R14_D7.2 97.79,82.55 104.14,82.55 105.41,83.82 105.41,86.36 106.68,87.63 U70.13
MISO: J70.1 U70.18 | length 10.8
  Top Layer w0.5: U70.18 117.475,92.71 120.65,89.535 125.095,89.535
MOSI: J70.4 U70.17 | length 15
  Bottom Layer w0.5: U70.17 121.92,90.17 123.19,91.44 123.19,95.25 124.46,96.52 J70.4
NetC20_A0_1: C20_A0.1 D20_A0.1 D21_A0.2 R22_A0.1 R23_A0.1 R24_A0.2 | length 14.8
  Top Layer w0.5: D20_A0.1 R24_A0.2 C20_A0.1 R22_A0.1
NetC20_A1_1: C20_A1.1 D20_A1.1 D21_A1.2 R22_A1.1 R23_A1.1 R24_A1.2 | length 14.8
  Top Layer w0.5: D20_A1.1 R24_A1.2 C20_A1.1 R22_A1.1
NetC20_A2_1: C20_A2.1 D20_A2.1 D21_A2.2 R22_A2.1 R23_A2.1 R24_A2.2 | length 14.8
  Top Layer w0.5: D20_A2.1 R24_A2.2 C20_A2.1 R22_A2.1
NetC20_A3_1: C20_A3.1 D20_A3.1 D21_A3.2 R22_A3.1 R23_A3.1 R24_A3.2 | length 14.8
  Top Layer w0.5: D20_A3.1 R24_A3.2 C20_A3.1 R22_A3.1
NetC30_1: C30.1 D30.1 D32.2 R30.2 R31.1 R33.2 R34.2 | length 29.8
  Top Layer w0.5: R31.1 R30.2 99.06,151.13 100.33,149.86 102.87,149.86 104.14,151.13 D32.2 106.68,152.4 107.95,151.13 ; D30.1 R33.2 ; R34.2 107.95,151.13 ; C30.1 107.95,151.13
NetC31_1: C31.1 D33.2 Q30.3 R35.2 R36.2 | length 42.6
  Top Layer w0.5: R35.2 101.6,153.67 105.41,157.48 118.11,157.48 123.19,152.4 R36.2 ; Q30.3 115.57,149.807 C31.1@120.651,154.888
NetC50_1: C50.1 D51.2 D52.2 Q50.1 Q51.3 R50.1 | length 30.9
  Top Layer w0.5: D52.2 57.15,175.26 62.23,170.18 ; R50.1 62.23,170.18 ; Q50.1 Q50.1@67.31,170.18 ; Q51.3 C50.1 D51.2 69.85,167.64 Q50.1@67.31,170.18 ; 62.23,170.18 Q50.1@67.31,170.18
NetC50_2: C50.2 D51.1 Q50.3 Q51.2 R51.2 | length 22.7
  Top Layer w0.5: Q50.3 67.35,175.3 69.85,177.8 D51.1 77.47,172.72 Q51.2
  Bottom Layer w0.5: Q51.2 81.28,172.72 82.55,171.45 R51.2
NetC70_1: C70.1 U70.9 X70.1 X71.1 | length 16.4
  Top Layer w0.5: X71.1 97.155,97.79 U70.9 ; X70.1 C70.1
NetC71_1: C71.1 U70.10 X70.2 X71.2 | length 16.3
  Top Layer w0.5: X71.2 96.975,95.25 U70.10 ; C71.1 X70.2
NetD10_D0_1: D10_D0.1 J10_D0.2 O10_D0.2 Q10_D0.2 | length 49.6
  Top Layer w0.5: O10_D0.2 140.97,82.55 142.24,81.28 145.415,81.28 147.32,79.375 ; D10_D0.1 147.32,79.375 ; Q10_D0.2 149.225,81.28 147.32,79.375
  Top Layer w1: Q10_D0.2 J10_D0.2@175.18,81.28
  Bottom Layer w1: Q10_D0.2 J10_D0.2@175.18,81.28
NetD10_D0_2: D10_D0.2 O10_D0.1 R11_D0.1 | length 8.1
  Top Layer w0.5: O10_D0.1 144.78,86.36 R11_D0.1
NetD10_D1_1: D10_D1.1 J10_D1.2 O10_D1.2 Q10_D1.2 | length 49.6
  Top Layer w0.5: O10_D1.2 140.97,97.79 142.24,96.52 145.415,96.52 147.32,94.615 ; D10_D1.1 147.32,94.615 ; Q10_D1.2 149.225,96.52 147.32,94.615
  Top Layer w1: Q10_D1.2 J10_D1.2@175.18,96.52
  Bottom Layer w1: Q10_D1.2 J10_D1.2@175.18,96.52
NetD10_D1_2: D10_D1.2 O10_D1.1 R11_D1.1 | length 8.1
  Top Layer w0.5: O10_D1.1 144.78,101.6 R11_D1.1
NetD10_D2_1: D10_D2.1 J10_D2.2 O10_D2.2 Q10_D2.2 | length 49.6
  Top Layer w0.5: Q10_D2.2 76.835,157.48 78.74,159.385 ; D10_D2.1 78.74,159.385 ; O10_D2.2 85.09,156.21 83.82,157.48 80.645,157.48 78.74,159.385
  Top Layer w1: J10_D2.2@50.88,157.48 Q10_D2.2
  Bottom Layer w1: J10_D2.2@50.88,157.48 Q10_D2.2
NetD10_D2_2: D10_D2.2 O10_D2.1 R11_D2.1 | length 8.1
  Top Layer w0.5: R11_D2.1 81.28,152.4 O10_D2.1
NetD10_D3_1: D10_D3.1 J10_D3.2 O10_D3.2 Q10_D3.2 | length 49.6
  Top Layer w0.5: Q10_D3.2 76.835,142.24 78.74,144.145 ; D10_D3.1 78.74,144.145 ; O10_D3.2 85.09,140.97 83.82,142.24 80.645,142.24 78.74,144.145
  Top Layer w1: J10_D3.2@50.88,142.24 Q10_D3.2
  Bottom Layer w1: J10_D3.2@50.88,142.24 Q10_D3.2
NetD10_D3_2: D10_D3.2 O10_D3.1 R11_D3.1 | length 8.1
  Top Layer w0.5: R11_D3.1 81.28,137.16 O10_D3.1
NetD10_D4_1: D10_D4.1 J10_D4.2 O10_D4.2 Q10_D4.2 | length 49.6
  Top Layer w0.5: Q10_D4.2 76.835,127 78.74,128.905 ; D10_D4.1 78.74,128.905 ; O10_D4.2 85.09,125.73 83.82,127 80.645,127 78.74,128.905
  Top Layer w1: J10_D4.2@50.88,127 Q10_D4.2
  Bottom Layer w1: J10_D4.2@50.88,127 Q10_D4.2
NetD10_D4_2: D10_D4.2 O10_D4.1 R11_D4.1 | length 8.1
  Top Layer w0.5: R11_D4.1 81.28,121.92 O10_D4.1
NetD10_D5_1: D10_D5.1 J10_D5.2 O10_D5.2 Q10_D5.2 | length 49.6
  Top Layer w0.5: Q10_D5.2 76.835,111.76 78.74,113.665 ; D10_D5.1 78.74,113.665 ; O10_D5.2 85.09,110.49 83.82,111.76 80.645,111.76 78.74,113.665
  Top Layer w1: J10_D5.2@50.88,111.76 Q10_D5.2
  Bottom Layer w1: J10_D5.2@50.88,111.76 Q10_D5.2
NetD10_D5_2: D10_D5.2 O10_D5.1 R11_D5.1 | length 8.1
  Top Layer w0.5: R11_D5.1 81.28,106.68 O10_D5.1
NetD10_D6_1: D10_D6.1 J10_D6.2 O10_D6.2 Q10_D6.2 | length 49.6
  Top Layer w0.5: Q10_D6.2 76.835,96.52 78.74,98.425 ; D10_D6.1 78.74,98.425 ; O10_D6.2 85.09,95.25 83.82,96.52 80.645,96.52 78.74,98.425
  Top Layer w1: J10_D6.2@50.88,96.52 Q10_D6.2
  Bottom Layer w1: J10_D6.2@50.88,96.52 Q10_D6.2
NetD10_D6_2: D10_D6.2 O10_D6.1 R11_D6.1 | length 8.1
  Top Layer w0.5: R11_D6.1 81.28,91.44 O10_D6.1
NetD10_D7_1: D10_D7.1 J10_D7.2 O10_D7.2 Q10_D7.2 | length 49.6
  Top Layer w0.5: Q10_D7.2 76.835,81.28 78.74,83.185 ; D10_D7.1 78.74,83.185 ; O10_D7.2 85.09,80.01 83.82,81.28 80.645,81.28 78.74,83.185
  Top Layer w1: J10_D7.2@50.88,81.28 Q10_D7.2
  Bottom Layer w1: J10_D7.2@50.88,81.28 Q10_D7.2
NetD10_D7_2: D10_D7.2 O10_D7.1 R11_D7.1 | length 8.1
  Top Layer w0.5: R11_D7.1 81.28,76.2 O10_D7.1
NetD11_D0_2: D11_D0.2 O10_D0.4 Q10_D0.1 R10_D0.1 R14_D0.1 R15_D0.2 | length 40.9
  Top Layer w0.5: R14_D0.1 R10_D0.1 139.065,74.295 142.24,74.295 143.51,75.565 ; O10_D0.4 143.51,75.565 ; Q10_D0.1 165.06,76.2 D11_D0.2 158.115,78.105 150.495,78.105 149.225,76.835 149.225,75.565 147.955,74.295 144.78,74.295 143.51,75.565
NetD11_D1_2: D11_D1.2 O10_D1.4 Q10_D1.1 R10_D1.1 R14_D1.1 R15_D1.2 | length 40.9
  Top Layer w0.5: R14_D1.1 R10_D1.1 139.065,89.535 142.24,89.535 143.51,90.805 ; O10_D1.4 143.51,90.805 ; Q10_D1.1 165.06,91.44 D11_D1.2 158.115,93.345 150.495,93.345 149.225,92.075 149.225,90.805 147.955,89.535 144.78,89.535 143.51,90.805
NetD11_D2_2: D11_D2.2 O10_D2.4 Q10_D2.1 R10_D2.1 R14_D2.1 R15_D2.2 | length 40.9
  Top Layer w0.5: Q10_D2.1 61,162.56 D11_D2.2 67.945,160.655 75.565,160.655 76.835,161.925 76.835,163.195 78.105,164.465 81.28,164.465 82.55,163.195 ; O10_D2.4 82.55,163.195 ; R14_D2.1 R10_D2.1 86.995,164.465 83.82,164.465 82.55,163.195
NetD11_D3_2: D11_D3.2 O10_D3.4 Q10_D3.1 R10_D3.1 R14_D3.1 R15_D3.2 | length 40.9
  Top Layer w0.5: Q10_D3.1 61,147.32 D11_D3.2 67.945,145.415 75.565,145.415 76.835,146.685 76.835,147.955 78.105,149.225 81.28,149.225 82.55,147.955 ; O10_D3.4 82.55,147.955 ; R14_D3.1 R10_D3.1 86.995,149.225 83.82,149.225 82.55,147.955
NetD11_D4_2: D11_D4.2 O10_D4.4 Q10_D4.1 R10_D4.1 R14_D4.1 R15_D4.2 | length 40.9
  Top Layer w0.5: Q10_D4.1 61,132.08 D11_D4.2 67.945,130.175 75.565,130.175 76.835,131.445 76.835,132.715 78.105,133.985 81.28,133.985 82.55,132.715 ; O10_D4.4 82.55,132.715 ; R14_D4.1 R10_D4.1 86.995,133.985 83.82,133.985 82.55,132.715
NetD11_D5_2: D11_D5.2 O10_D5.4 Q10_D5.1 R10_D5.1 R14_D5.1 R15_D5.2 | length 40.9
  Top Layer w0.5: Q10_D5.1 61,116.84 D11_D5.2 67.945,114.935 75.565,114.935 76.835,116.205 76.835,117.475 78.105,118.745 81.28,118.745 82.55,117.475 ; O10_D5.4 82.55,117.475 ; R14_D5.1 R10_D5.1 86.995,118.745 83.82,118.745 82.55,117.475
NetD11_D6_2: D11_D6.2 O10_D6.4 Q10_D6.1 R10_D6.1 R14_D6.1 R15_D6.2 | length 40.9
  Top Layer w0.5: Q10_D6.1 61,101.6 D11_D6.2 67.945,99.695 75.565,99.695 76.835,100.965 76.835,102.235 78.105,103.505 81.28,103.505 82.55,102.235 ; O10_D6.4 82.55,102.235 ; R14_D6.1 R10_D6.1 86.995,103.505 83.82,103.505 82.55,102.235
NetD11_D7_2: D11_D7.2 O10_D7.4 Q10_D7.1 R10_D7.1 R14_D7.1 R15_D7.2 | length 40.9
  Top Layer w0.5: Q10_D7.1 61,86.36 D11_D7.2 67.945,84.455 75.565,84.455 76.835,85.725 76.835,86.995 78.105,88.265 81.28,88.265 82.55,86.995 ; O10_D7.4 82.55,86.995 ; R14_D7.1 R10_D7.1 86.995,88.265 83.82,88.265 82.55,86.995
NetD30_2: D30.2 D31.1 | length 11.2
  Top Layer w0.5: D31.1 102.87,144.145 105.41,141.605 D30.2
NetD31_2: D31.2 O30.4 Q30.2 R34.1 | length 23
  Top Layer w0.5: D31.2 104.775,135.255 106.045,135.255 113.03,142.24 116.84,142.24 O30.4
NetD34_2: D34.2 O31.1 R36.1 R39.2 | length 25.3
  Top Layer w0.5: R36.1 127,160.02 129.54,157.48 R39.2 D34.2
  Bottom Layer w0.5: D34.2 136.525,152.4 138.43,150.495 O31.1
NetD50_1: D50.1 J50.3 | length 14.9
  Top Layer w0.5: J50.3 52.865,177.64 59.69,170.815 D50.1
NetD50_2: D50.2 Q50.2 R50.2 | length 9.7
  Top Layer w0.5: D50.2 R50.2 Q50.2
NetD70_2: D70.2 R77.2 | length 29.3
  Top Layer w0.5: D70.2 109.22,78.74 111.76,76.2 123.825,76.2 125.73,78.105 127.635,78.105 R77.2
NetD71_2: D71.2 R78.2 | length 11.7
  Top Layer w0.5: D71.2 124.46,80.01 129.54,80.01 132.08,77.47 R78.2
NetJ10_D0_3: J10_D0.3 R11_D0.2 R12_D0.1 R13_D0.1 | length 25.8
  Top Layer w0.5: R11_D0.2 R12_D0.1 159.385,74.295 168.275,74.295 170.34,76.36 J10_D0.3
NetJ10_D1_3: J10_D1.3 R11_D1.2 R12_D1.1 R13_D1.1 | length 25.8
  Top Layer w0.5: R11_D1.2 R12_D1.1 159.385,89.535 168.275,89.535 170.34,91.6 J10_D1.3
NetJ10_D2_3: J10_D2.3 R11_D2.2 R12_D2.1 R13_D2.1 | length 25.8
  Top Layer w0.5: J10_D2.3 55.72,162.4 57.785,164.465 66.675,164.465 R12_D2.1 R11_D2.2
NetJ10_D3_3: J10_D3.3 R11_D3.2 R12_D3.1 R13_D3.1 | length 25.8
  Top Layer w0.5: J10_D3.3 55.72,147.16 57.785,149.225 66.675,149.225 R12_D3.1 R11_D3.2
NetJ10_D4_3: J10_D4.3 R11_D4.2 R12_D4.1 R13_D4.1 | length 25.8
  Top Layer w0.5: J10_D4.3 55.72,131.92 57.785,133.985 66.675,133.985 R12_D4.1 R11_D4.2
NetJ10_D5_3: J10_D5.3 R11_D5.2 R12_D5.1 R13_D5.1 | length 25.8
  Top Layer w0.5: J10_D5.3 55.72,116.68 57.785,118.745 66.675,118.745 R12_D5.1 R11_D5.2
NetJ10_D6_3: J10_D6.3 R11_D6.2 R12_D6.1 R13_D6.1 | length 25.8
  Top Layer w0.5: J10_D6.3 55.72,101.44 57.785,103.505 66.675,103.505 R12_D6.1 R11_D6.2
NetJ10_D7_3: J10_D7.3 R11_D7.2 R12_D7.1 R13_D7.1 | length 25.8
  Top Layer w0.5: J10_D7.3 55.72,86.2 57.785,88.265 66.675,88.265 R12_D7.1 R11_D7.2
NetJ20_A0_2: J20_A0.2 R22_A0.2 | length 17
  Top Layer w0.5: R22_A0.2 162.56,113.03 163.75,111.84 J20_A0.2
NetJ20_A0_3: J20_A0.3 R20_A0.1 R21_A0.1 | length 8.7
  Top Layer w0.5: R20_A0.1 J20_A0.3@175.1,106.68
NetJ20_A1_2: J20_A1.2 R22_A1.2 | length 17
  Top Layer w0.5: R22_A1.2 162.56,128.27 163.75,127.08 J20_A1.2
NetJ20_A1_3: J20_A1.3 R20_A1.1 R21_A1.1 | length 8.7
  Top Layer w0.5: R20_A1.1 J20_A1.3@175.1,121.92
NetJ20_A2_2: J20_A2.2 R22_A2.2 | length 17
  Top Layer w0.5: R22_A2.2 162.56,143.51 163.75,142.32 J20_A2.2
NetJ20_A2_3: J20_A2.3 R20_A2.1 R21_A2.1 | length 8.7
  Top Layer w0.5: R20_A2.1 J20_A2.3@175.1,137.16
NetJ20_A3_2: J20_A3.2 R22_A3.2 | length 17
  Top Layer w0.5: R22_A3.2 162.56,158.75 163.75,157.56 J20_A3.2
NetJ20_A3_3: J20_A3.3 R20_A3.1 R21_A3.1 | length 8.7
  Top Layer w0.5: R20_A3.1 J20_A3.3@175.1,152.4
NetJ30_3: J30.3 R32.1 | length 14.8
  Top Layer w0.5: J30.3 109.22,124.46 116.84,124.46 R32.1
NetJ70_5: J70.5 R71.2 R72.2 | length 13.5
  Top Layer w0.5: J70.5 129.54,99.06 R72.2
  Bottom Layer w0.5: J70.5 128.27,100.965 130.81,103.505 130.81,106.68
NetO30_2: O30.2 R37.2 | length 11.5
  Top Layer w0.5: O30.2 128.27,143.51 ; 128.27,143.034 R37.2
NetQ30_1: Q30.1 R33.1 | length 6.1
  Top Layer w0.5: R33.1 113.03,137.16 Q30.1
R\E\S\E\T\: R70.1 R71.1 S70.2 S70.4 U70.1 | length 39.4
  Top Layer w0.5: U70.1 109.855,120.015 117.475,120.015 120.65,116.84 R71.1 ; 130.47,116.84 S70.2
SCK: J70.3 U70.19 | length 22.1
  Top Layer w0.5: U70.19 116.84,95.25 120.65,91.44 128.905,91.44 130.175,92.71 130.175,95.885 129.54,96.52 J70.3
SCL: J71.9 J71.10 R75.1 U70.28 | length 98.3
  Top Layer w0.5: U70.28 117.475,118.11 120.65,114.935 132.715,114.935 140.97,123.19 140.97,167.64 139.7,168.91 125.73,168.91 J71.10 J71.9
SDA: J71.5 J71.6 R76.1 U70.27 | length 97.8
  Top Layer w0.5: U70.27 117.475,115.57 119.38,113.665 133.985,113.665 142.875,122.555 142.875,168.275 140.335,170.815 128.905,170.815 J71.6 J71.5
SS: R72.1 U70.16 | length 18.1
  Bottom Layer w0.5: U70.16 125.73,87.63 129.54,91.44 R72.1
pads on no net: J30.2 J30.6 J50.2

## Polygon pours and split planes (outlines as drawn)
0V on Bottom Layer "Bottom Layer-No Net" (solid, remove dead copper, pour order 1000): 93.345,109.22 93.345,83.82 104.14,83.82 104.14,109.22

## Silkscreen, mask and mechanical layers (free items; w line width, h text height)
Top Overlay:
  text "VIN" at 38.1,177.165 h1.52
  text "GND" at 182.88,177.165 h1.52
  text "5V" at 182.88,172.085 h1.52
  text "GND" at 38.1,167.005 h1.52
  text "12V" at 182.88,167.005 h1.52
  text "VOUT" at 38.1,161.925 h1.52
  text "GND" at 182.88,161.925 h1.52
  text "DIG2" at 38.1,156.845 h1.52
  text "ADC3" at 182.88,156.845 h1.52
  text "GND" at 38.1,153.67 h1.52
  text "VOUT" at 182.88,153.67 h1.52
  text "VOUT" at 38.1,144.78 h1.52
  text "GND" at 182.88,144.78 h1.52
  text "DIG3" at 38.1,141.605 h1.52
  text "ADC2" at 182.88,141.605 h1.52
  text "GND" at 38.1,136.525 h1.52
  text "VOUT" at 182.88,136.525 h1.52
  text "GND" at 182.88,132.08 h1.52
  text "VOUT" at 38.1,131.445 h1.52
  text "DIG4" at 38.1,126.365 h1.52
  text "ADC1" at 182.88,126.365 h1.52
  text "GND" at 38.1,121.285 h1.52
  text "VOUT" at 182.88,121.285 h1.52
  text "VOUT" at 38.1,116.205 h1.52
  text "GND" at 182.88,116.205 h1.52
  text "DIG5" at 38.1,111.125 h1.52
  text "ADC0" at 182.88,111.125 h1.52
  text "GND" at 38.1,107.95 h1.52
  text "VOUT" at 182.88,107.95 h1.52
  text "VOUT" at 38.1,99.06 h1.52
  text "GND" at 182.88,99.06 h1.52
  text "DIG6" at 38.1,95.885 h1.52
  text "DIG1" at 182.88,95.885 h1.52
  text "GND" at 38.1,90.805 h1.52
  text "VOUT" at 182.88,90.805 h1.52
  text "VOUT" at 38.1,85.725 h1.52
  text "GND" at 182.88,85.725 h1.52
  text "DIG7" at 38.1,80.645 h1.52
  text "DIG0" at 182.88,80.645 h1.52
  text "GND" at 38.1,75.565 h1.52
  text "VOUT" at 182.88,75.565 h1.52
Mechanical 1:
  lines w0.3: 223.266,45.974 223.52,45.72